# Altium PCB MAGI'sUSBASP-MBH.PcbDoc
Units mm, origin at the board's own origin, x right, y up, seen from the top; angles counter-clockwise.
Board outline 152.4 x 101.6 mm, 2 copper layers (Top Layer, Bottom Layer); 18 components, 21 nets, 80 pads, 0 vias.
Unrouted connection lines stored in the file: 1.
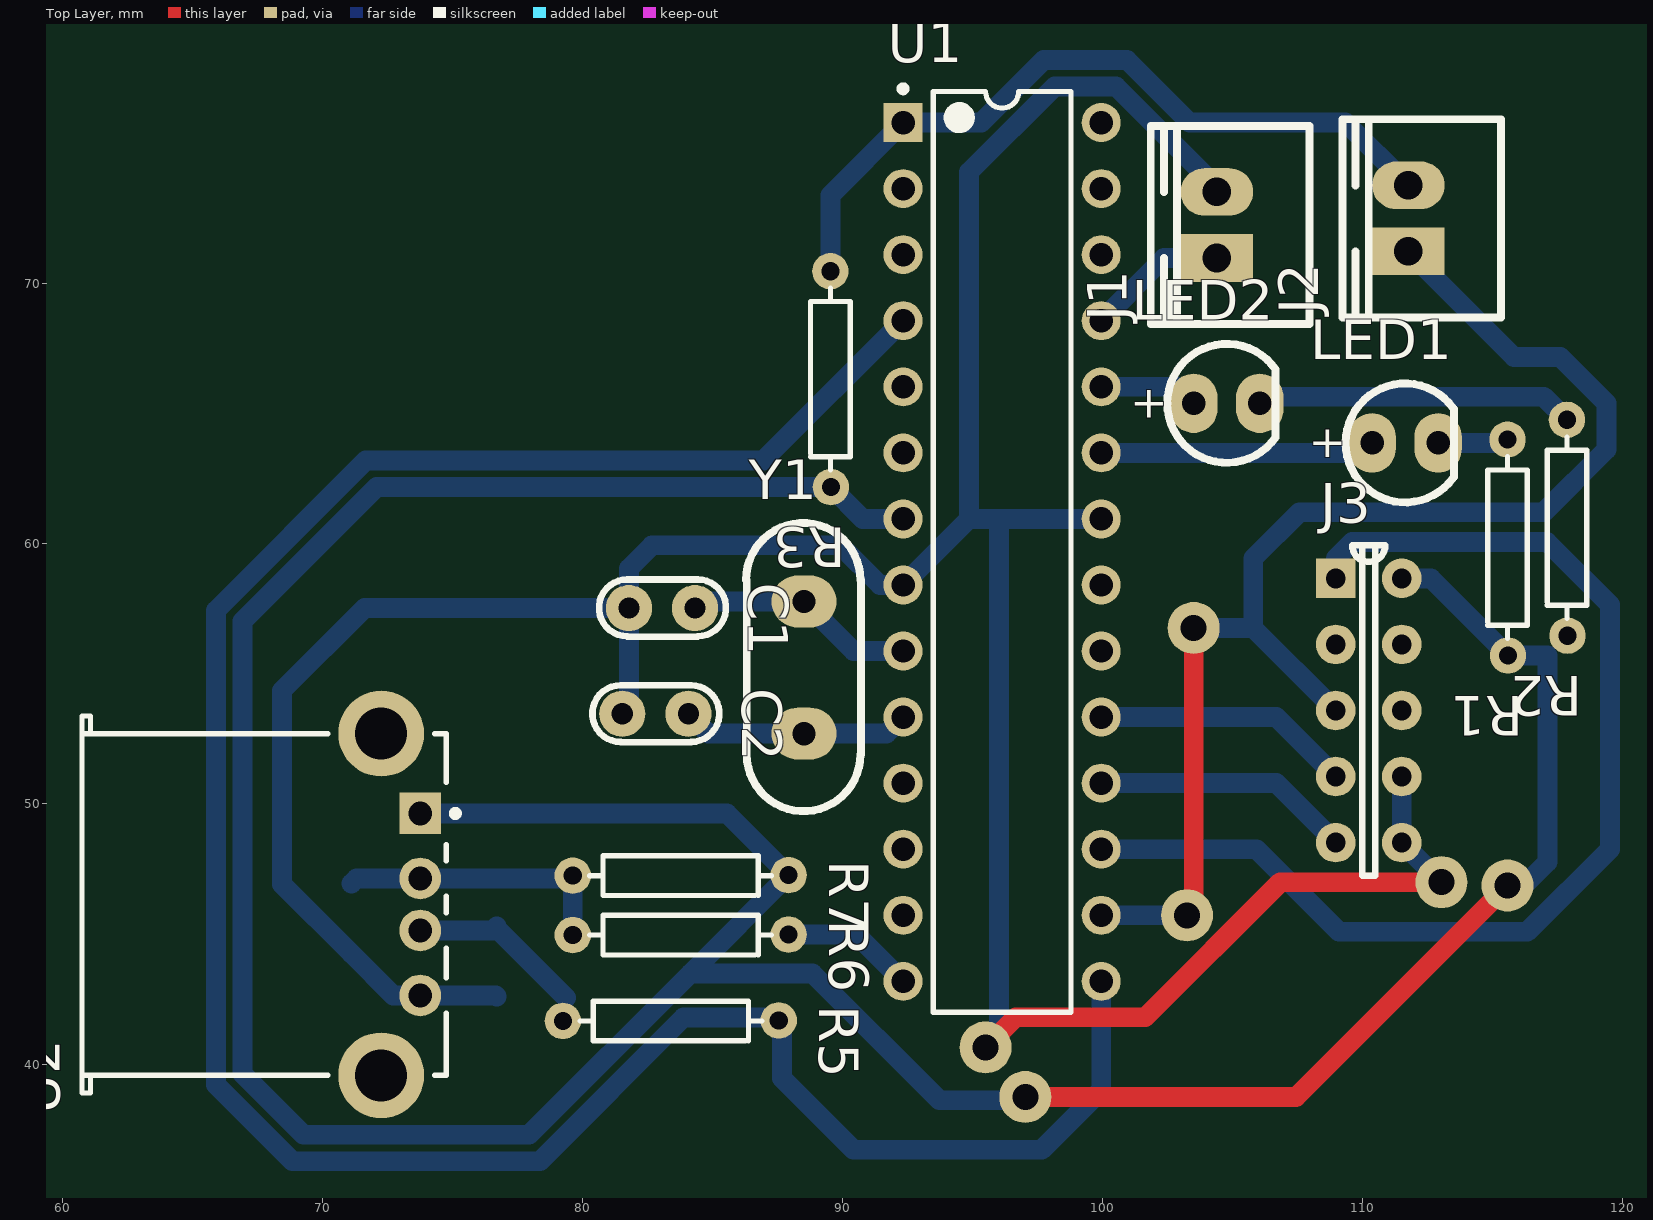
[diagram p0: Top Layer view]
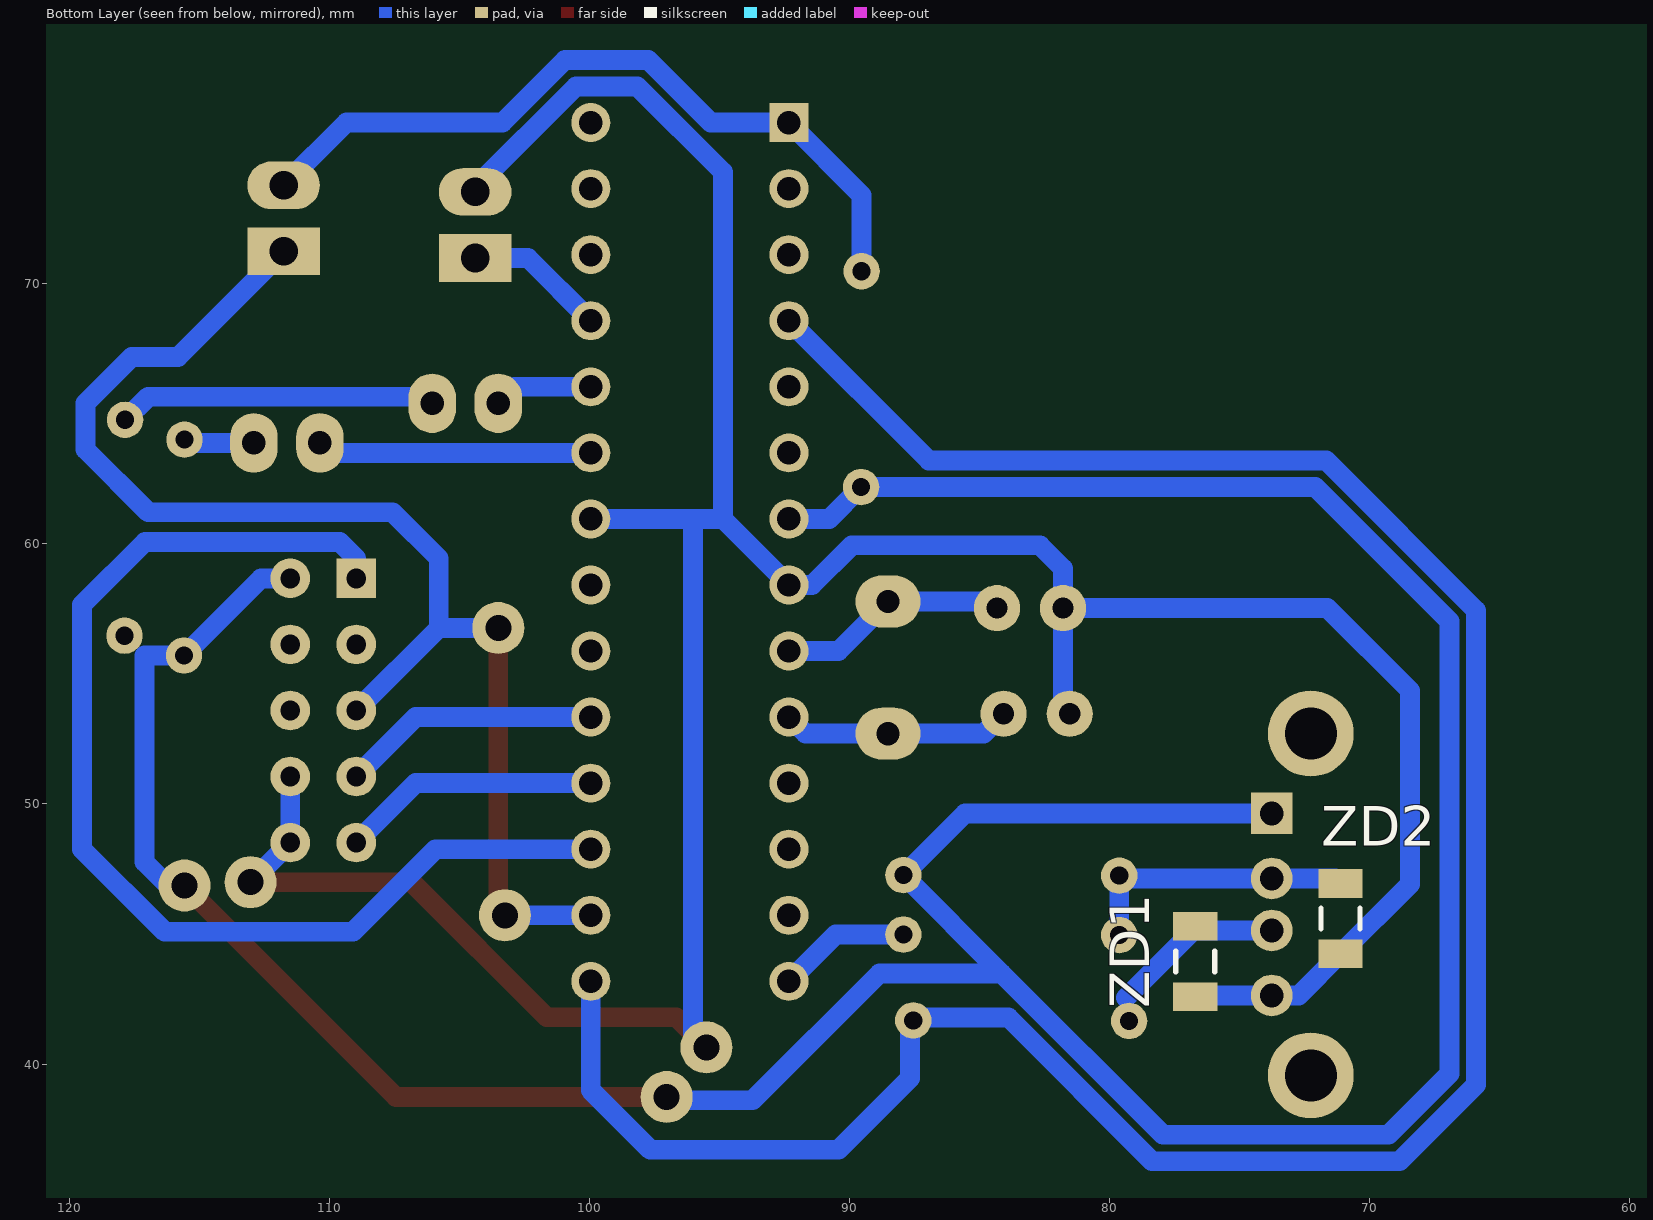
[diagram p1: Bottom Layer view, seen from below]

## Layer stack, top to bottom
Top Layer: signal copper 0.0356
Dielectric: dielectric 0.32, FR-4, Dk 4.8
Bottom Layer: signal copper 0.0356

## Board outline
25.4,25.4 177.8,25.4 177.8,127 25.4,127

## Design rules (kind name [scope] priority, off if disabled: settings)
Clearance [All] p1: gap=0.254
PolygonConnect [All] p1: connectstyle=Relief reliefconductorwidth=0.254 reliefentries=4 polygonreliefangle="90 Angle" airgapwidth=0.254
RoutingVias [All] p1: holewidth=0.711 width=1.27 viastyle="Through Hole" minholewidth=0.711 minwidth=1.27 maxholewidth=0.711 maxwidth=1.27
SolderMaskExpansion [All] p1: expansion=0.102
Width [All] p1: maxlimit=0.762 minlimit=0.762 preferedwidth=0.762
28 further rules are at their usual default settings.

## Components (designator, comment, footprint, x,y, rotation, side; value= is the part's Value field where it differs from the comment)
C1 "CAP_1" C100 81.788,57.531 r0 top
C2 "CAP_1" C100 81.534,53.467 r0 top
J1 "CON2" CON2 104.394,70.993 r90 top
J2 "CON2" CON2 111.76,71.247 r90 top
J3 "AVRISP" AVRISP 108.966,58.674 r0 top
LED1 "LED_1" LED5 110.363,63.881 r0 top
LED2 "LED_1" LED5 103.505,65.405 r0 top
R1 "RES1" 1/4W 115.57,64.008 r270 top
R2 "RES1" 1/4W 117.856,64.77 r270 top
R3 "RES1" 1/4W 89.535,70.485 r270 top
R5 "RES1" 1/4W 79.248,41.656 r0 top
R6 "RES1" 1/4W 79.629,44.958 r0 top
R7 "RES1" 1/4W 79.629,47.244 r0 top
U1 "ATmega8A-PU" 28P3 96.139,59.69 r0 top
U2 "USB" USB 72.263,52.705 r90 top
Y1 "CRYSTAL" XTAL1 88.519,52.705 r90 top
ZD1 "DIODE SCHOTTKY_1" C1206 76.708,43.942 r90 bottom
ZD2 "DIODE SCHOTTKY_1" C1206 71.12,45.593 r90 bottom

## Footprints (in the part's own frame and the unit in brackets; to place one, negate y for a bottom-side part, rotate by r counter-clockwise, add the part's x,y. Pads: shape width x height; smd on the part's side, far side on the other; paste and mask are expansions set on the pad)
1/4W [mm]
  round 1.4 hole 0.7: 1(0,0) 2(8.3,0.02)
  silkscreen extent 0.66,-0.76 7.64,0.76
28P3 [mm] "DIP, 28-Leads, Row Spacing 7.62mm, Pitch 2.54mm, Body 34.67x7.3mm"
  rect 1.5x1.5 hole 0.9: 1(-3.81,16.51)
  round 1.5 hole 0.9: 2(-3.81,13.97) 3(-3.81,11.43) 4(-3.81,8.89) 5(-3.81,6.35) 6(-3.81,3.81) 7(-3.81,1.27) 8(-3.81,-1.27) 9(-3.81,-3.81) 10(-3.81,-6.35) 11(-3.81,-8.89) 12(-3.81,-11.43) 13(-3.81,-13.97) 14(-3.81,-16.51) 15(3.81,-16.51) 16(3.81,-13.97) 17(3.81,-11.43) 18(3.81,-8.89) 19(3.81,-6.35) 20(3.81,-3.81) 21(3.81,-1.27) 22(3.81,1.27) 23(3.81,3.81) 24(3.81,6.35) 25(3.81,8.89) 26(3.81,11.43) 27(3.81,13.97) 28(3.81,16.51)
  silkscreen extent -3.93,-17.7 2.65,17.93, body extent -3.6,-17.65 3.6,17.65, height 4.58
AVRISP [mil]
  rect 60x60 hole 30: 1(0,0)
  round 60 hole 30: 2(100,0) 3(0,-100) 4(100,-100) 5(0,-200) 6(100,-200) 7(0,-300) 8(100,-300) 9(0,-400) 10(100,-400)
  silkscreen extent 25,-450 75,50
C100 [mil]
  round 70 hole 32: 1(0,0) 2(100,0)
  silkscreen extent -45,-43 147,43
C1206 [mm] "Chip Capacitor, Body 3.2x1.6mm, IPC High Density"
  rect 1.1x1.7 smd: 1(-1.35,0) 2(1.35,0)
  silkscreen extent -0.4,-0.75 0.4,0.75, body extent -1.7,-0.9 1.7,0.9, height 1.3
CON2 [mil]
  rect 72x110 hole 43.31: 1(0,0)
  oval 72x110 hole 43.31: 2(100,0)
  silkscreen extent -100,-140 200,100
LED5 [mil]
  oval 72x90 hole 35.43: A(0,0) K(100,0)
  silkscreen extent -40,-90 124,90
USB [mm]
  rect 1.6x1.6 hole 0.92: 1(-3.07,-1.5)
  round 1.6 hole 0.92: 2(-5.57,-1.5) 3(-7.57,-1.5) 4(-10.07,-1.5)
  round 3.3 hole 2: 5(-13.14,0) 6(0,0)
  silkscreen extent -13.82,-2.98 0.68,11.5
XTAL1 [mm]
  oval 2x2.5 hole 0.9: 1(0,0) 2(5.08,0)
  silkscreen extent -2.98,-2.2 8.1,2.23

## Part data
C1 C2: "Capacitor"
J1 J2: "Connector"
U1: "8-bit AVR Microcontroller, 8KB Flash, 512 Bytes EEPROM, 1KB SRAM, 28-pin PDIP, Industrial Grade (-40癈 to 85癈)"
Y1: "Crystal"
ZD1 ZD2: "Schottky Diode"

## Free pads (board coordinates)
  round 2 hole 1: 0(103.505,56.769) 1(103.251,45.72) 2(95.504,40.64) 3(113.03,46.99) 5(97.028,38.735) 6(115.57,46.863)

## Nets (pads, with @x,y where several pads share a name; then routed paths per layer and width w, separated by ;. In a path a pad name is that pad's centre, name@x,y a point inside that pad or via, vN(x,y) a via of type N, cw(c..) or ccw(c..) an arc to the next point about the centre after c; other vN are vias at no path point)
GND: C1.1 C2.1 J1.2 J3.8 J3.10 pad.2 pad.3 U1.8 U1.22 U2.4 ZD1.1 ZD2.1 | length 129.6
  Top Layer w0.762: pad.2 96.659,41.795 101.638,41.795 106.833,46.99 pad.3
  Bottom Layer w0.762: ZD1.1 76.665,42.635 U2.4 72.728,42.635 ZD2.1 68.453,46.91 68.453,54.356 71.628,57.531 C1.1 ; C2.1 81.788,53.721 C1.1 ; pad.2 96.012,41.148 96.012,60.96 ; U1.22 96.012,60.96 ; J1.2 104.394,73.714 100.523,77.585 98.159,77.585 94.869,74.295 94.869,60.96 ; J3.8 J3.10 pad.3 pad.3@113.157,46.99 ; C1.1 81.788,59.055 82.677,59.944 89.916,59.944 91.44,58.42 U1.8 94.869,60.96 ; 94.869,60.96 96.012,60.96
MISO: J3.9 U1.18 | length 10
  Bottom Layer w0.762: U1.18 106.68,50.8 J3.9
MOSI: J3.1 U1.17 | length 44.2
  Bottom Layer w0.762: U1.17 105.918,48.26 109.093,45.085 116.332,45.085 119.507,48.26 119.507,57.658 117.094,60.071 109.601,60.071 108.966,59.436 J3.1
NetC1_2: C1.2 U1.9 Y1.2 | length 8.9
  Bottom Layer w0.762: C1.2 84.582,57.785 Y1.2 90.424,55.88 U1.9
NetC2_2: C2.2 U1.10 Y1.1 | length 8.8
  Bottom Layer w0.762: C2.2 84.836,52.705 Y1.1 91.694,52.705 U1.10
NetJ1_1: J1.1 U1.25 | length 5.4
  Bottom Layer w0.762: U1.25 102.362,70.993 J1.1
NetJ2_2: J2.2 R3.1 U1.1 | length 29.3
  Bottom Layer w0.762: R3.1 89.535,73.406 U1.1 95.337,76.2 97.738,78.601 100.944,78.601 103.345,76.2 109.347,76.2 J2.2
NetJ3_4: J3.4
NetLED1_A: LED1.A U1.23 | length 10.6
  Bottom Layer w0.762: U1.23 109.982,63.5 LED1.A
NetLED1_K: LED1.K R1.1 | length 2.7
  Bottom Layer w0.762: LED1.K 115.443,63.881 R1.1
NetLED2_A: LED2.A U1.24 | length 3.8
  Bottom Layer w0.762: U1.24 102.87,66.04 LED2.A
NetLED2_K: LED2.K R2.1 | length 12.3
  Bottom Layer w0.762: LED2.K 106.299,65.659 116.967,65.659 R2.1
NetR5_1: R5.1 U2.3 ZD1.2 | length 6.9
  Bottom Layer w0.762: U2.3 76.551,45.135 ZD1.2 76.708,45.212 79.375,42.545
NetR6_1: R6.1 R7.1 U2.2 ZD2.2 | length 10.9
  Bottom Layer w0.762: ZD2.2 71.312,47.135 U2.2 79.52,47.135 R7.1 R6.1
PB0: R6.2 U1.14 | length 5.1
  Bottom Layer w0.762: R6.2 90.531,44.978 U1.14
PB1: R5.2 U1.4 U1.15 | length 95.4
  Bottom Layer w0.762: U1.4 86.95,63.201 71.67,63.201 65.913,57.444 65.913,39.203 68.852,36.264 78.366,36.264 83.885,41.783 87.675,41.783 87.675,39.452 90.424,36.703 97.663,36.703 99.949,38.989 U1.15
RST: J2.1 J3.5 pad.0 pad.1 U1.16 | length 51
  Top Layer w0.762: pad.1 103.505,45.974 pad.0
  Bottom Layer w0.762: U1.16 pad.1 ; pad.0 105.791,56.769 ; J3.5 105.791,56.769 ; J2.1 115.824,67.183 117.602,67.183 119.38,65.405 119.38,63.627 116.967,61.214 107.569,61.214 105.791,59.436 105.791,56.769
RXD: U1.2
SCK: J3.7 U1.19 | length 10
  Bottom Layer w0.762: U1.19 106.68,53.34 J3.7
TXD: U1.3
VCC: J3.2 pad.5 pad.6 R1.2 R2.2 R3.2 R7.2 U1.7 U1.20 U2.1 | length 140.2
  Top Layer w0.762: pad.5 107.442,38.735 pad.6
  Bottom Layer w0.762: U2.1 85.558,49.635 R7.2 84.15,43.485 ; U1.7 90.78,60.96 R3.2 72.091,62.185 66.929,57.023 66.929,39.624 69.273,37.28 77.945,37.28 84.15,43.485 ; pad.5 96.901,38.608 93.726,38.608 88.849,43.485 84.15,43.485 ; J3.2 112.624,58.674 R1.2 117.114,55.708 117.114,47.772 pad.6@115.824,46.482
pads on no net: J3.3 J3.6 U1.5 U1.6 U1.11 U1.12 U1.13 U1.21 U1.26 U1.27 U1.28 U2.5 U2.6

## Text inside footprints (layer, text, board x,y; h text height)
LED1: Top Overlay "+" at 107.925,63.322 h1.27
LED2: Top Overlay "+" at 101.067,64.846 h1.27